# EAGLE board ElectronicSpeedRegulator (EAGLE 7.5.0)
AVR8 -Electronic Speed Regulator
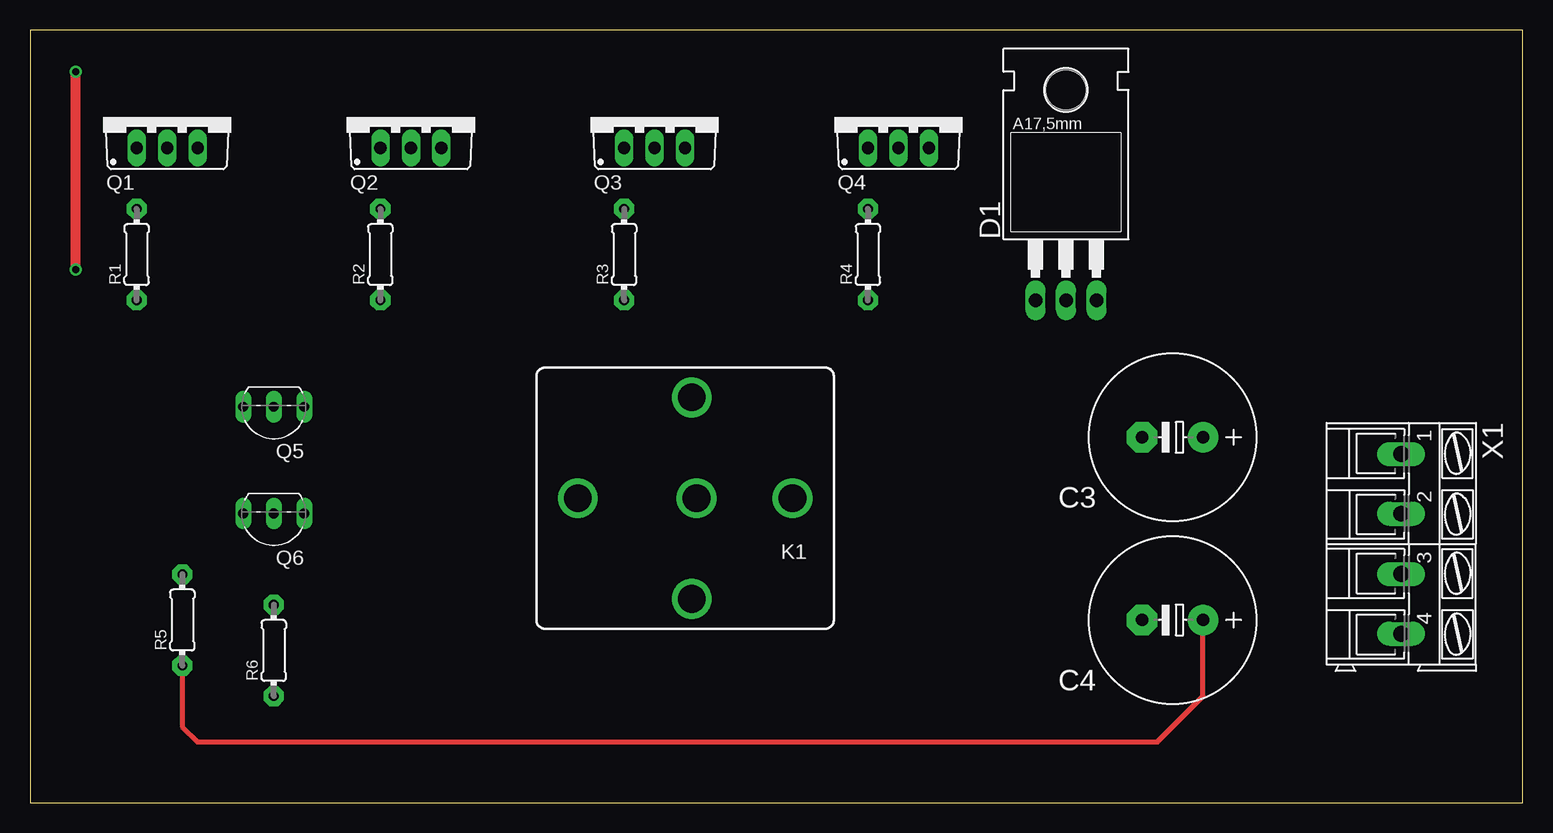
[diagram p0: board, top side]
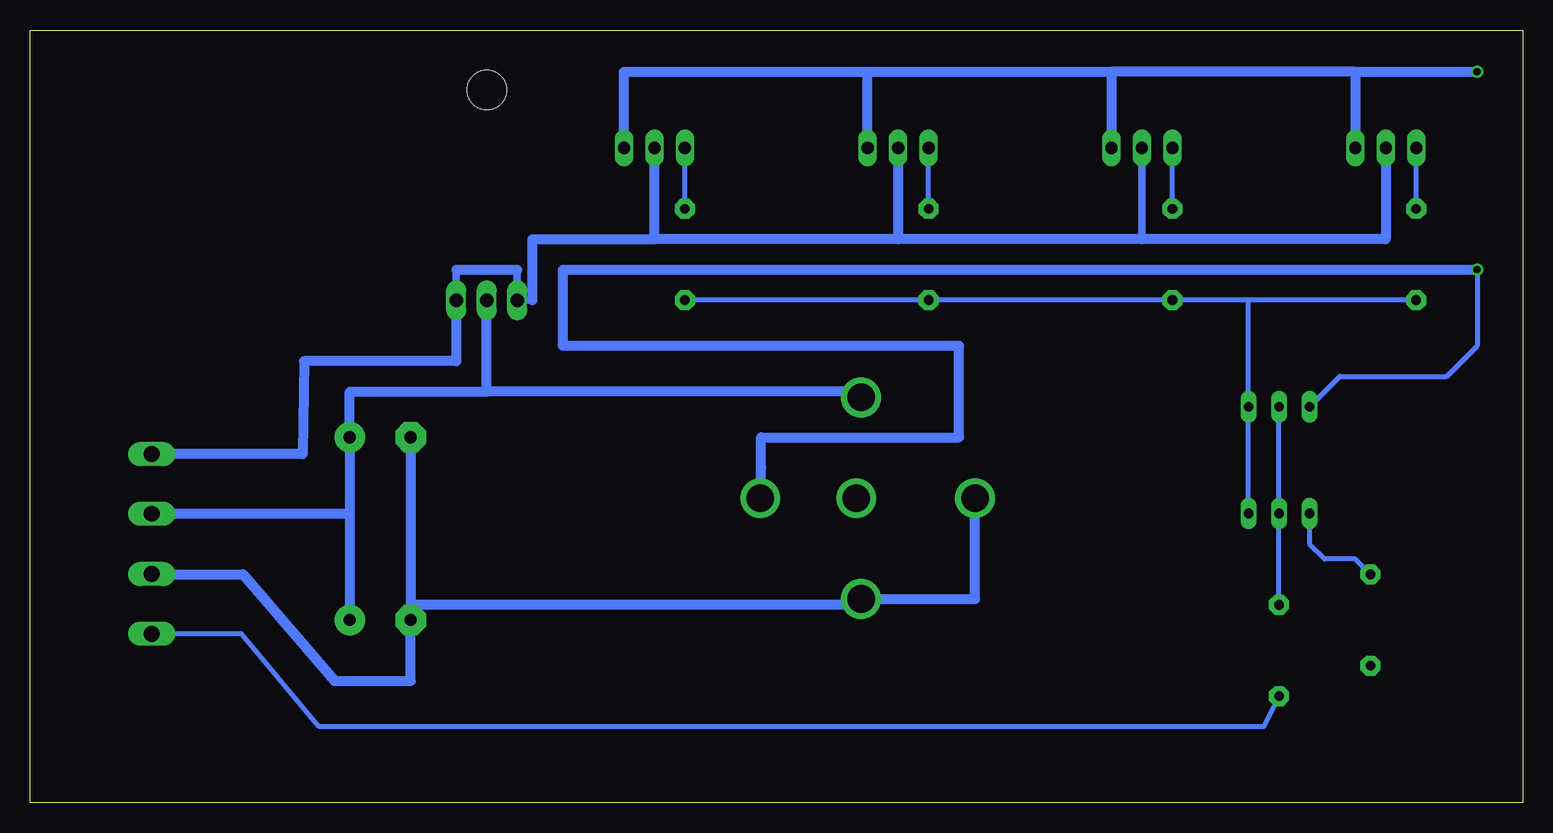
[diagram p1: board, bottom side, seen from below]

Size 124.44 x 64.44 mm. Coordinates in mm from the lower left corner, seen from the top.
Outline: 0,0 124.44,0 124.44,64.44 0,64.44 0,0
Copper layers (1*16): Top 0.035mm / dielectric 1.5mm / Bottom 0.035mm
Design rules "default": minimum track width 10mil, minimum drill 24mil, track to track 8mil, track to pad 8mil, pad to pad 8mil, via to via 8mil, smd to smd 8mil, copper to edge 40mil, drill to drill 8mil, minimum pad ring 10mil, minimum via ring 8mil, stop-mask expansion 4mil, vias tented up to drill 0mil, thermal gap 10mil

## Footprints (pad centres in the part's own frame; a part is rotated, then mirrored left to right if it is on the bottom)
E5-13 = drill 1.016 pad 2.54: + -2.54,0 | drill 1.016 pad 2.54 octagon: - 2.54,0
TO220AB = drill 1.118 long: A1 -2.54,-6.35; A2 2.54,-6.35; C 0,-6.35 | hole 3.302: 0,11.176
CB1 = drill 2.3: 30 8.95,0; 85 -0.55,-8.4; 86 -0.55,8.4; 87 -8.95,0; 87A -0.95,0
TO220BV = drill 1.016 long: D 0,-2.54; G -2.54,-2.54; S 2.54,-2.54
TO92-EBC = drill 0.813 long: B 0,-1.27; C -2.54,-1.27; E 2.54,-1.27
0204/7 = drill 0.813 pad 1.676 octagon: 1 -3.81,0; 2 3.81,0
AK300/4 = drill 1.321 long: 1 -7.493,0; 2 -2.515,0; 3 2.515,0; 4 7.493,0

## Placement (x,y rotation side)
C3  [E5-13]  95.25,30.48 180 top
C4  [E5-13]  95.25,15.24 180 top
D1  MUR620CT  [TO220AB]  86.36,48.26 0 top
K1  CB1A-P-12V  [CB1]  54.61,25.4 180 top
Q1  STP5NA50  [TO220BV]  11.43,57.15 0 top
Q2  STP5NA50  [TO220BV]  31.75,57.15 0 top
Q3  STP5NA50  [TO220BV]  52.07,57.15 0 top
Q4  STP5NA50  [TO220BV]  72.39,57.15 0 top
Q5  NPN  [TO92-EBC]  20.32,31.75 180 top
Q6  PNP  [TO92-EBC]  20.32,22.86 180 top
R1  50  [0204/7]  8.89,45.72 90 top
R2  50  [0204/7]  29.21,45.72 90 top
R3  50  [0204/7]  49.53,45.72 90 top
R4  50  [0204/7]  69.85,45.72 90 top
R5  1.2k  [0204/7]  12.7,15.24 90 top
R6  5k  [0204/7]  20.32,12.7 90 top
X1  Conn1  [AK300/4]  114.3,21.59 270 top

## Library data of the parts
C3 C4 R1-R6 = adafruit
D1 = diode
K1 = relay; MF: AROMAT/ MATSUSHITA; MPN: CB1A-P-12V; OC_FARNELL: 1270582; OC_NEWARK: 50B849
Q1-Q4 = transistor-power
Q5 = transistor-npn
Q6 = transistor-pnp
X1 = con-ptr500; OC_FARNELL: unknown; OC_NEWARK: unknown

## Nets
GND: C3.- C4.- K1.30 K1.86 X1.3
GND_RELAY: K1.87 Q1.S Q2.S Q3.S Q4.S Q5.E
MCU_PWM_SIGNAL: R6.1 X1.4
MCU_PWM_SIGNAL_BASE: Q5.B Q6.B R6.2
MOSFET_DRIVER_SWITCH: Q5.C Q6.C R1.1 R2.1 R3.1 R4.1
MOTOR_DRIVER_V-: D1.A1 D1.A2 Q1.D Q2.D Q3.D Q4.D X1.1
N$1: Q1.G R1.2
N$2: Q2.G R2.2
N$3: Q3.G R3.2
N$4: Q4.G R4.2
S$3: Q6.E R5.2
V+: C3.+ C4.+ D1.C K1.85 R5.1 X1.2

## Tracks (layer width: path | path; a pad name or v marks a point on that pad's centre or on a via)
GND
  Bottom 0.61: 92.71,16.51 C4.- | K1.86 55.65,16.51 | X1.3 114.28,19.05
  Bottom 0.813: K1.86 45.66,17 K1.30 | C3.- 92.71,16.51 55.65,16.51 | 114.28,19.05 106.68,19.05 99.06,10.16 92.71,10.16 C4.-
GND_RELAY  (via drill 0.6)
  Top 0.813: v3.81,44.45 v3.81,60.96
  Bottom 0.406: v3.81,44.45 3.81,38.1 6.35,35.56 15.24,35.56 Q5.E
  Bottom 0.813: v3.81,44.45 80.01,44.45 80.01,38.1 46.99,38.1 46.99,30.48 63.5,30.48 63.5,27.94 K1.87 | 13.97,60.96 v3.81,60.96 | 13.97,60.96 Q1.S | 13.97,60.96 34.29,60.96 | 34.29,60.96 Q2.S | Q4.S 74.93,60.96 54.61,60.96 | 54.61,60.96 34.29,60.96 | Q3.S 54.61,60.96
MCU_PWM_SIGNAL
  Bottom 0.406: R6.1 21.59,6.35 100.33,6.35 106.81,14.1 X1.4
MCU_PWM_SIGNAL_BASE
  Bottom 0.406: R6.2 Q6.B Q5.B
MOSFET_DRIVER_SWITCH
  Bottom 0.406: R4.1 R3.1 R2.1 22.86,41.91 | R1.1 22.86,41.91 | Q6.C Q5.C 22.86,41.91
MOTOR_DRIVER_V-
  Bottom 0.61: 31.75,46.99 Q2.D | D1.A2 88.9,44.45 | 83.82,44.45 D1.A1 82.55,41.91
  Bottom 0.813: Q1.D 11.43,46.99 31.75,46.99 52.07,46.99 | Q3.D 52.07,46.99 | 52.07,46.99 72.39,46.99 | 72.39,46.99 Q4.D | 82.55,41.91 82.55,46.99 72.39,46.99 | 88.9,44.45 83.82,44.45 | D1.A2 88.9,36.83 101.6,36.83 101.73,29.08 X1.1
N$1
  Bottom 0.406: R1.2 Q1.G
N$2
  Bottom 0.406: R2.2 Q2.G
N$3
  Bottom 0.406: R3.2 Q3.G
N$4
  Bottom 0.406: R4.2 Q4.G
S$3
  Bottom 0.406: R5.2 13.97,20.32 16.51,20.32 17.78,21.59 Q6.E
V+
  Top 0.406: R5.1 12.7,6.35 13.97,5.08 93.98,5.08 97.79,8.89 C4.+
  Bottom 0.61: X1.2 114.28,24.13 | K1.85 55.65,34.29
  Bottom 0.813: 55.65,34.29 86.36,34.29 | 86.36,34.29 D1.C | 86.36,34.29 97.79,34.29 C3.+ 97.79,24.13 | 97.79,24.13 C4.+ | 114.28,24.13 97.79,24.13